# EAGLE board msx_rc2014_adapter (EAGLE 7.6.0)
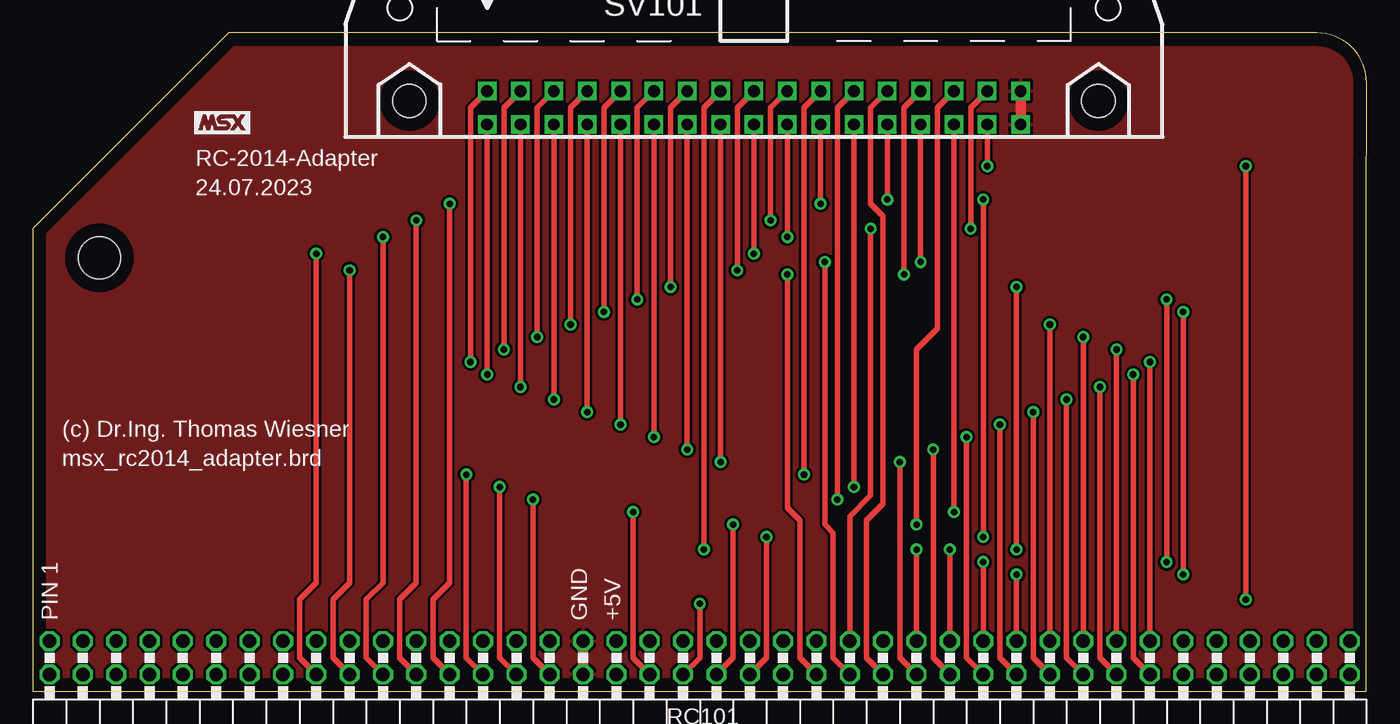
[diagram p0: board, top side]
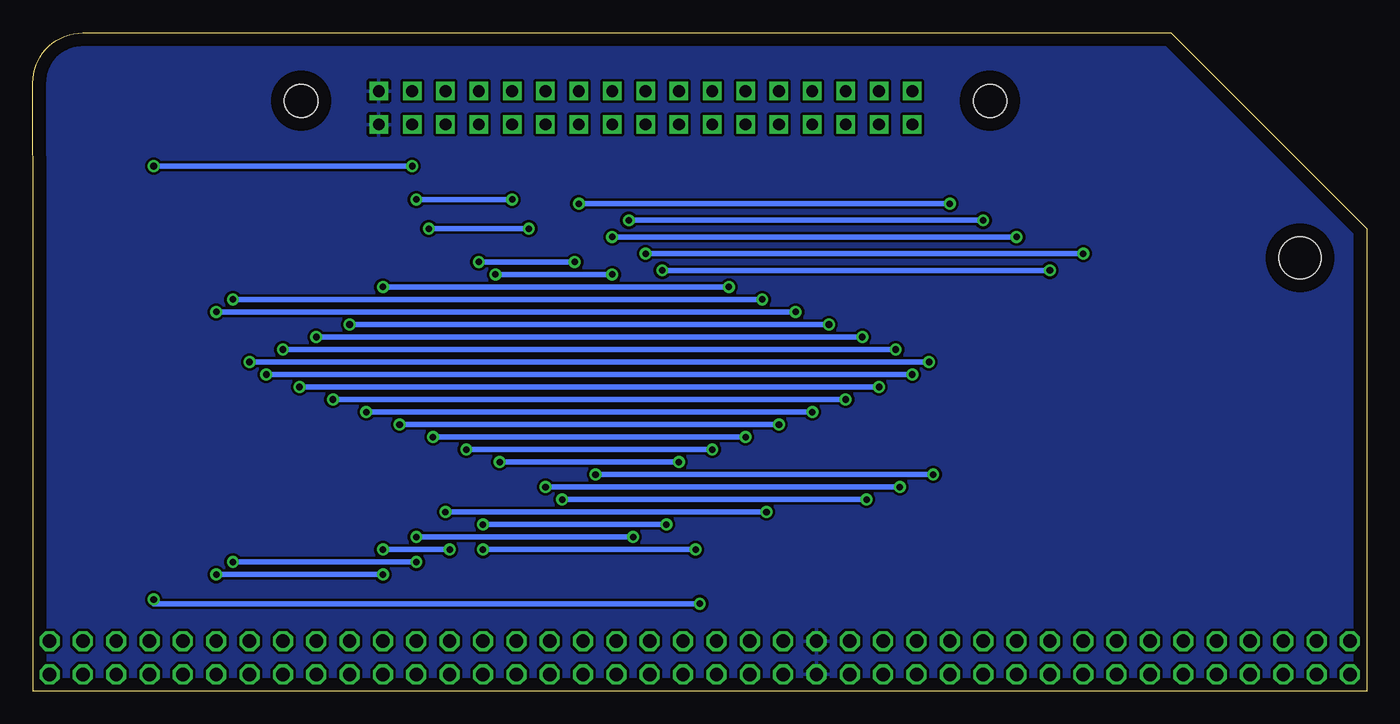
[diagram p1: board, bottom side, seen from below]

Size 101.6 x 50.16 mm. Coordinates in mm from the lower left corner, seen from the top.
Outline: 0,0 101.58,0 101.58,35.23 101.6,46.35 arc90 97.79,50.16 14.92,50.16 0,35.24 0,0
Copper layers (1*16): Top 0.035mm / dielectric 1.5mm / Bottom 0.035mm
Design rules "default *": minimum track width 10mil, minimum drill 0.5mm, track to track 8mil, track to pad 4mil, pad to pad 8mil, via to via 8mil, smd to smd 8mil, copper to edge 40mil, drill to drill 8mil, minimum pad ring 10mil, minimum via ring 8mil, stop-mask expansion 4mil, vias tented up to drill 0mil, thermal gap 10mil
Holes 3.2 mm at 5.08,33.02

## Footprints (pad centres in the part's own frame; a part is rotated, then mirrored left to right if it is on the bottom)
RC2014-STECKER = drill 1.016 octagon: A1 -49.53,1.27; A2 -46.99,1.27; A3 -44.45,1.27; A4 -41.91,1.27; A5 -39.37,1.27; A6 -36.83,1.27; A7 -34.29,1.27; A8 -31.75,1.27; A9 -29.21,1.27; A10 -26.67,1.27; A11 -24.13,1.27; A12 -21.59,1.27; A13 -19.05,1.27; A14 -16.51,1.27; A15 -13.97,1.27; A16 -11.43,1.27; A17 -8.89,1.27; A18 -6.35,1.27; A19 -3.81,1.27; A20 -1.27,1.27; A21 1.27,1.27; A22 3.81,1.27; A23 6.35,1.27; A24 8.89,1.27; A25 11.43,1.27; A26 13.97,1.27; A27 16.51,1.27; A28 19.05,1.27; A29 21.59,1.27; A30 24.13,1.27; A31 26.67,1.27; A32 29.21,1.27; A33 31.75,1.27; A34 34.29,1.27; A35 36.83,1.27; A36 39.37,1.27; A37 41.91,1.27; A38 44.45,1.27; A39 46.99,1.27; A40 49.53,1.27; B1 -49.53,3.81; B2 -46.99,3.81; B3 -44.45,3.81; B4 -41.91,3.81; B5 -39.37,3.81; B6 -36.83,3.81; B7 -34.29,3.81; B8 -31.75,3.81; B9 -29.21,3.81; B10 -26.67,3.81; B11 -24.13,3.81; B12 -21.59,3.81; B13 -19.05,3.81; B14 -16.51,3.81; B15 -13.97,3.81; B16 -11.43,3.81; B17 -8.89,3.81; B18 -6.35,3.81; B19 -3.81,3.81; B20 -1.27,3.81; B21 1.27,3.81; B22 3.81,3.81; B23 6.35,3.81; B24 8.89,3.81; B25 11.43,3.81; B26 13.97,3.81; B27 16.51,3.81; B28 19.05,3.81; B29 21.59,3.81; B30 24.13,3.81; B31 26.67,3.81; B32 29.21,3.81; B33 31.75,3.81; B34 34.29,3.81; B35 36.83,3.81; B36 39.37,3.81; B37 41.91,3.81; B38 44.45,3.81; B39 46.99,3.81; B40 49.53,3.81 | hole 3.2: -45.72,33.02
3M_34L = drill 0.9 square: 1 -20.32,-5.08; 2 -20.32,-2.54; 3 -17.78,-5.08; 4 -17.78,-2.54; 5 -15.24,-5.08; 6 -15.24,-2.54; 7 -12.7,-5.08; 8 -12.7,-2.54; 9 -10.16,-5.08; 10 -10.16,-2.54; 11 -7.62,-5.08; 12 -7.62,-2.54; 13 -5.08,-5.08; 14 -5.08,-2.54; 15 -2.54,-5.08; 16 -2.54,-2.54; 17 0,-5.08; 18 0,-2.54; 19 2.54,-5.08; 20 2.54,-2.54; 21 5.08,-5.08; 22 5.08,-2.54; 23 7.62,-5.08; 24 7.62,-2.54; 25 10.16,-5.08; 26 10.16,-2.54; 27 12.7,-5.08; 28 12.7,-2.54; 29 15.24,-5.08; 30 15.24,-2.54; 31 17.78,-5.08; 32 17.78,-2.54; 33 20.32,-5.08; 34 20.32,-2.54 | hole 2.54: -26.238,-3.277; 26.238,-3.277

## Placement (x,y rotation side)
RC101  [RC2014-STECKER]  50.8,0 0 top
SV101  [3M_34L]  54.93,48.26 0 top

## Library data of the parts
RC101 = mbc
SV101 = con-harting-ml; OC_FARNELL: unknown; OC_NEWARK: unknown

## Nets
/INTZ80#: RC101.A22 SV101.25
/IORQ#: RC101.A26 SV101.26
/M1#: RC101.A19 SV101.29
/RD#: RC101.A25 SV101.27
/RESET: RC101.A20 SV101.31
/WAIT: RC101.B25 SV101.32
/WR#: RC101.A24 SV101.28
A0#: RC101.A16 SV101.24
A1#: RC101.A15 SV101.23
A2#: RC101.A14 SV101.22
A3#: RC101.A13 SV101.21
A4#: RC101.A12 SV101.20
A5#: RC101.A11 SV101.19
A6#: RC101.A10 SV101.18
A7#: RC101.A9 SV101.17
CLK: RC101.A21 SV101.30
D0#: RC101.A27 SV101.15
D1#: RC101.A28 SV101.13
D2#: RC101.A29 SV101.11
D3#: RC101.A30 SV101.9
D4#: RC101.A31 SV101.7
D5#: RC101.A32 SV101.5
D6#: RC101.A33 SV101.3
D7#: RC101.A34 SV101.1
GND: RC101.A17 RC101.B17 SV101.33 SV101.34
INT0#: RC101.B27 SV101.16
INT1#: RC101.B28 SV101.14
INT2#: RC101.B29 SV101.12
INT3#: RC101.B30 SV101.10
INT4#: RC101.B31 SV101.8
INT5#: RC101.B32 SV101.6
INT6#: RC101.B33 SV101.4
INT7#: RC101.B34 SV101.2

## Tracks (layer width: path | path; a pad name or v marks a point on that pad's centre or on a via)
/INTZ80#  (via drill 0.5)
  Top 0.406: RC101.A22 55.88,2.54 v55.88,11.75 | v72.39,11.75 v72.39,37.47 | v65.09,37.47 SV101.25
  Bottom 0.406: v55.88,11.75 v72.39,11.75 | v72.39,37.47 v65.09,37.47
/IORQ#
  Top 0.406: RC101.A26 63.5,2.54 63.5,13.02 64.77,14.29 64.77,36.2 63.82,37.15 63.82,44.45 SV101.26
/M1#  (via drill 0.5)
  Top 0.406: RC101.A19 45.72,2.54 v45.72,13.65 | v70.17,13.65 SV101.29
  Bottom 0.406: v45.72,13.65 v70.17,13.65
/RD#  (via drill 0.5)
  Top 0.406: RC101.A25 60.96,2.54 60.96,12.06 60.33,12.7 v60.33,32.7 | v67.63,32.7 SV101.27
  Bottom 0.406: v60.33,32.7 v67.63,32.7
/RESET  (via drill 0.5)
  Top 0.406: SV101.31 v72.71,40.01 | v92.39,40.01 v92.39,6.99 | v50.8,6.67 50.8,2.54 RC101.A20
  Bottom 0.406: v72.71,40.01 v92.39,40.01 | v92.39,6.99 92.39,6.67 v50.8,6.67
/WAIT  (via drill 0.5)
  Top 0.406: RC101.B25 62.23,13.34 63.82,14.92 v63.82,35.24 | v71.44,35.24 71.44,44.45 SV101.32
  Bottom 0.406: v63.82,35.24 v71.44,35.24
/WR#  (via drill 0.5)
  Top 0.406: RC101.A24 58.42,2.54 58.42,13.02 57.47,13.97 v57.47,31.75 | v66.36,31.75 66.36,44.45 SV101.28
  Bottom 0.406: v57.47,31.75 v66.36,31.75
A0#  (via drill 0.5)
  Top 0.406: RC101.A16 38.1,2.54 v38.1,14.61 | v61.28,14.61 61.28,44.45 SV101.24
  Bottom 0.406: v38.1,14.61 v61.28,14.61
A1#  (via drill 0.5)
  Top 0.406: RC101.A15 35.56,2.54 v35.56,15.56 | v62.55,15.56 SV101.23
  Bottom 0.406: v35.56,15.56 v62.55,15.56
A2#  (via drill 0.5)
  Top 0.406: RC101.A14 33.02,2.54 v33.02,16.51 | v58.74,16.51 58.74,44.45 SV101.22
  Bottom 0.406: v33.02,16.51 v58.74,16.51
A3#  (via drill 0.5)
  Top 0.406: RC101.A13 30.48,2.54 30.48,6.99 31.75,8.26 v31.75,37.15 | v60.01,37.15 SV101.21
  Bottom 0.406: v31.75,37.15 v60.01,37.15
A4#  (via drill 0.5)
  Top 0.406: RC101.A12 27.94,2.54 27.94,6.99 29.21,8.26 v29.21,35.88 | v56.2,35.88 56.2,44.45 SV101.20
  Bottom 0.406: v29.21,35.88 v56.2,35.88
A5#  (via drill 0.5)
  Top 0.406: RC101.A11 25.4,2.54 25.4,6.99 26.67,8.26 v26.67,34.61 | v57.47,34.61 SV101.19
  Bottom 0.406: v26.67,34.61 v57.47,34.61
A6#  (via drill 0.5)
  Top 0.406: RC101.A10 22.86,2.54 22.86,6.99 24.13,8.26 v24.13,32.07 | v53.66,32.07 53.66,44.45 SV101.18
  Bottom 0.406: v24.13,32.07 v53.66,32.07
A7#  (via drill 0.5)
  Top 0.406: RC101.A9 20.32,2.54 20.32,6.99 21.59,8.26 v21.59,33.34 | v54.93,33.34 SV101.17
  Bottom 0.406: v21.59,33.34 v54.93,33.34
CLK  (via drill 0.5)
  Top 0.406: RC101.A21 53.34,2.54 v53.34,12.7 | v67.31,12.7 67.31,26.04 68.9,27.62 68.9,44.45 SV101.30
  Bottom 0.406: v53.34,12.7 v67.31,12.7
D0#  (via drill 0.5)
  Top 0.406: RC101.A27 66.04,2.54 v66.04,17.46 | v52.39,17.46 SV101.15
  Bottom 0.406: v66.04,17.46 v52.39,17.46
D1#  (via drill 0.5)
  Top 0.406: SV101.13 v49.85,18.41 | v68.58,18.41 68.58,2.54 RC101.A28
  Bottom 0.406: v49.85,18.41 v68.58,18.41
D2#  (via drill 0.5)
  Top 0.406: RC101.A29 71.12,2.54 v71.12,19.37 | v47.31,19.37 SV101.11
  Bottom 0.406: v71.12,19.37 v47.31,19.37
D3#  (via drill 0.5)
  Top 0.406: SV101.9 v44.77,20.32 | v73.66,20.32 73.66,2.54 RC101.A30
  Bottom 0.406: v44.77,20.32 v73.66,20.32
D4#  (via drill 0.5)
  Top 0.406: RC101.A31 76.2,2.54 v76.2,21.27 | v42.23,21.27 SV101.7
  Bottom 0.406: v76.2,21.27 v42.23,21.27
D5#  (via drill 0.5)
  Top 0.406: RC101.A32 78.74,2.54 v78.74,22.23 | v39.69,22.23 SV101.5
  Bottom 0.406: v78.74,22.23 v39.69,22.23
D6#  (via drill 0.5)
  Top 0.406: RC101.A33 81.28,2.54 v81.28,23.18 | v37.15,23.18 SV101.3
  Bottom 0.406: v81.28,23.18 v37.15,23.18
D7#  (via drill 0.5)
  Top 0.406: RC101.A34 83.82,2.54 v83.82,24.13 | v34.61,24.13 SV101.1
  Bottom 0.406: v83.82,24.13 v34.61,24.13
GND
  Top 0.813: RC101.A17 RC101.B17 | SV101.34 SV101.33
  pour Top: 0,0 0,35.24 14.92,50.16 97.79,50.16 arc-90 101.6,46.35 101.6,0
  pour Bottom: 0,0 0,35.24 14.92,50.16 97.79,50.16 arc-90 101.6,46.35 101.6,0
INT0#  (via drill 0.5)
  Top 0.406: SV101.16 51.12,44.45 v51.12,10.79 | v67.31,10.79 RC101.B27
  Bottom 0.406: v51.12,10.79 v67.31,10.79
INT1#  (via drill 0.5)
  Top 0.406: v74.93,10.79 v74.93,30.8 | v48.58,30.8 48.58,44.45 SV101.14 | RC101.B28 v69.85,10.79
  Bottom 0.406: v74.93,30.8 v48.58,30.8 | v69.85,10.79 v74.93,10.79
INT2#  (via drill 0.5)
  Top 0.406: SV101.12 46.04,44.45 v46.04,29.84 | RC101.B29 v72.39,9.84 | v86.36,9.84 v86.36,29.84
  Bottom 0.406: v46.04,29.84 v86.36,29.84 | v72.39,9.84 v86.36,9.84
INT3#  (via drill 0.5)
  Top 0.406: SV101.10 43.5,44.45 v43.5,28.89 | v87.63,28.89 v87.63,8.89 | RC101.B30 v74.93,8.89
  Bottom 0.406: v43.5,28.89 v87.63,28.89 | v74.93,8.89 v87.63,8.89
INT4#  (via drill 0.5)
  Top 0.406: v40.96,27.94 40.96,44.45 SV101.8 | RC101.B31 v77.47,27.94
  Bottom 0.406: v77.47,27.94 v40.96,27.94
INT5#  (via drill 0.5)
  Top 0.406: SV101.6 38.42,44.45 v38.42,26.99 | v80.01,26.99 RC101.B32
  Bottom 0.406: v38.42,26.99 v80.01,26.99
INT6#  (via drill 0.5)
  Top 0.406: SV101.4 35.88,44.45 v35.88,26.04 | RC101.B33 v82.55,26.04
  Bottom 0.406: v35.88,26.04 v82.55,26.04
INT7#  (via drill 0.5)
  Top 0.406: SV101.2 33.34,44.45 v33.34,25.08 | v85.09,25.08 RC101.B34
  Bottom 0.406: v33.34,25.08 v85.09,25.08

## Text on the board
tNames: RC-2014-Adapter | 24.07.2023 | (c) Dr.Ing. Thomas Wiesner | msx_rc2014_adapter.brd | PIN 1 | GND | +5V